# Altium PCB STM Custom Shield for UAV.PcbDoc
Units mil, origin at the board's own origin, x right, y up, seen from the top; angles counter-clockwise.
Board outline 2778.46 x 2376.3 mil, 2 copper layers (Top Layer, Bottom Layer); 15 components, 11 nets, 113 pads, 37 vias.
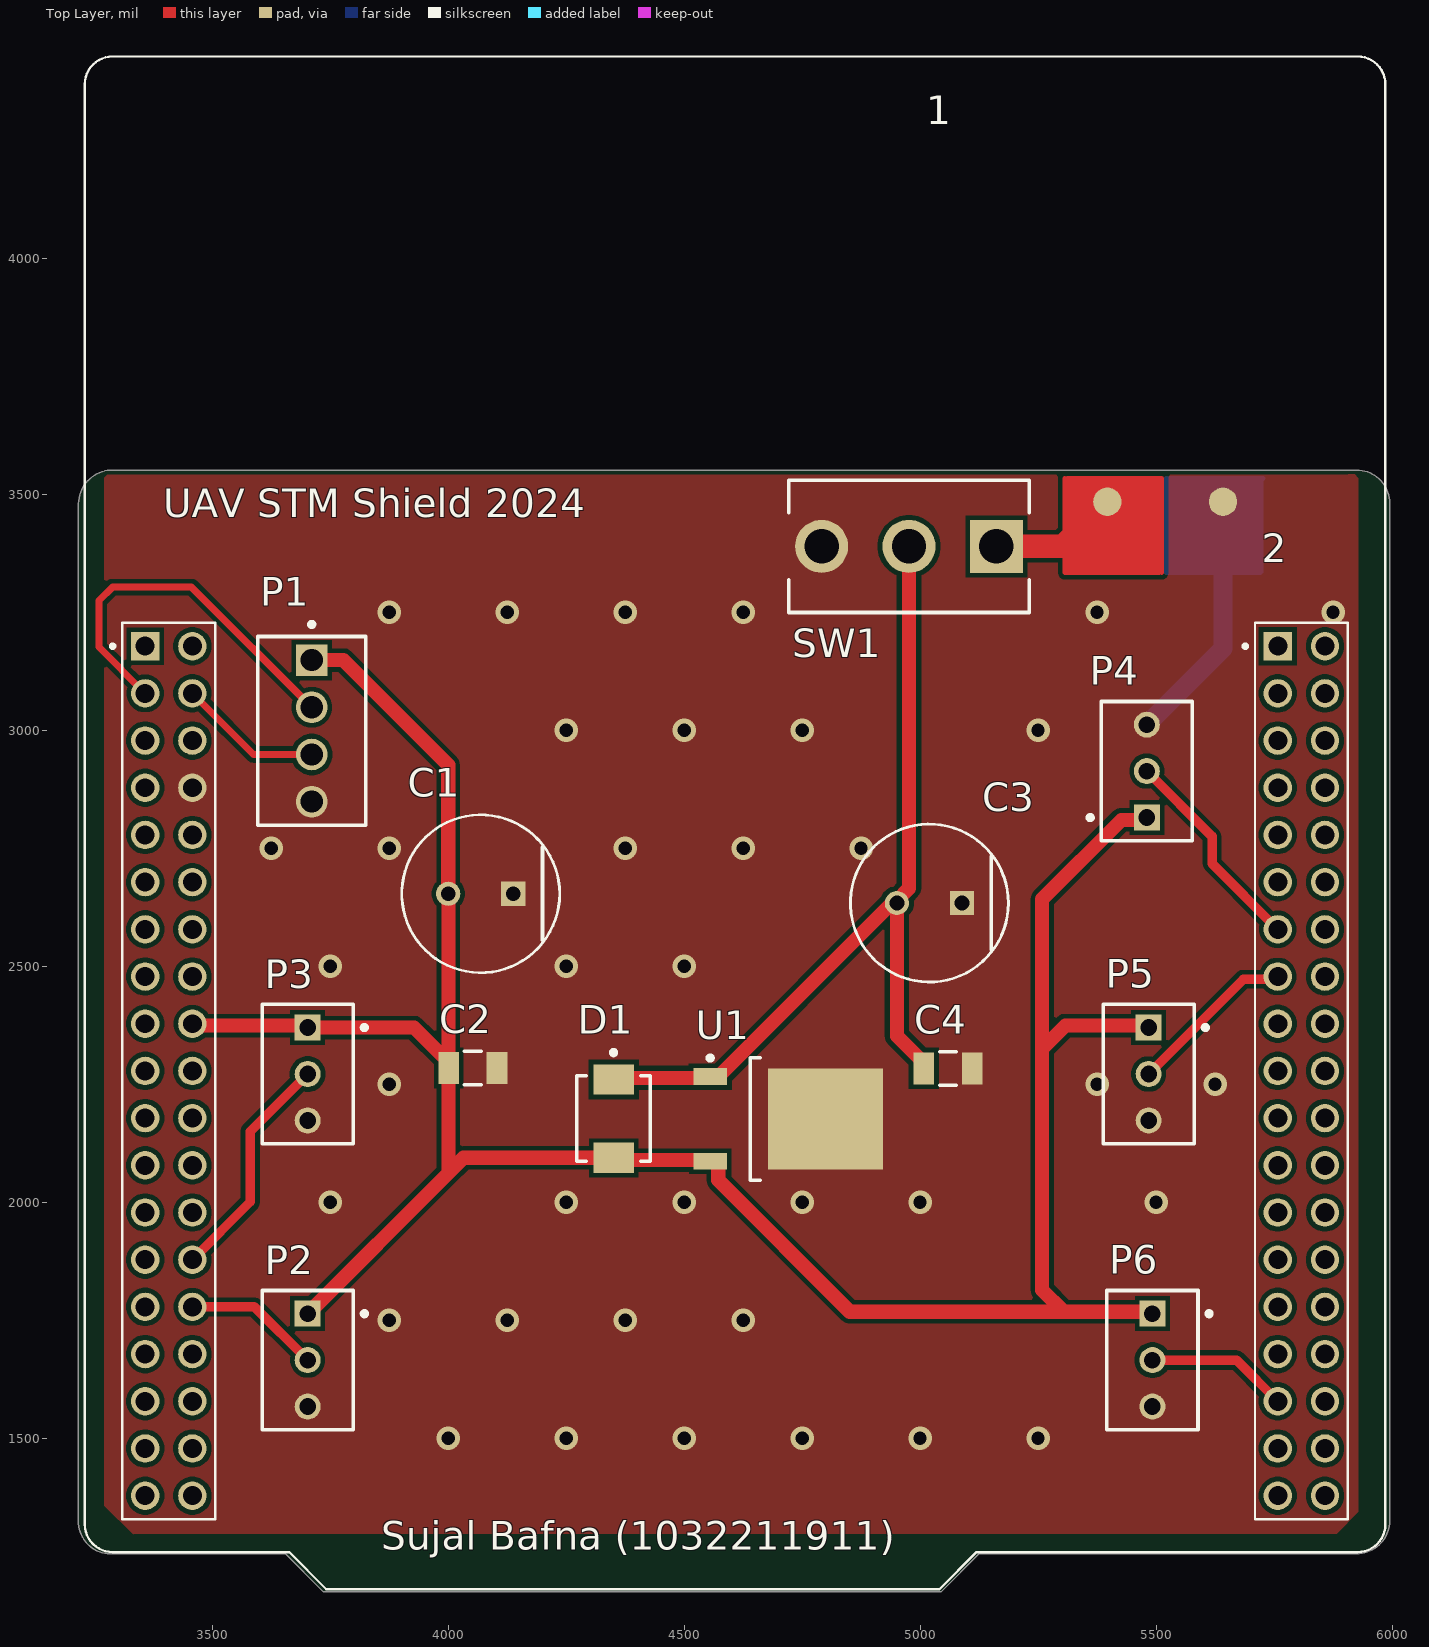
[diagram p0: Top Layer view]
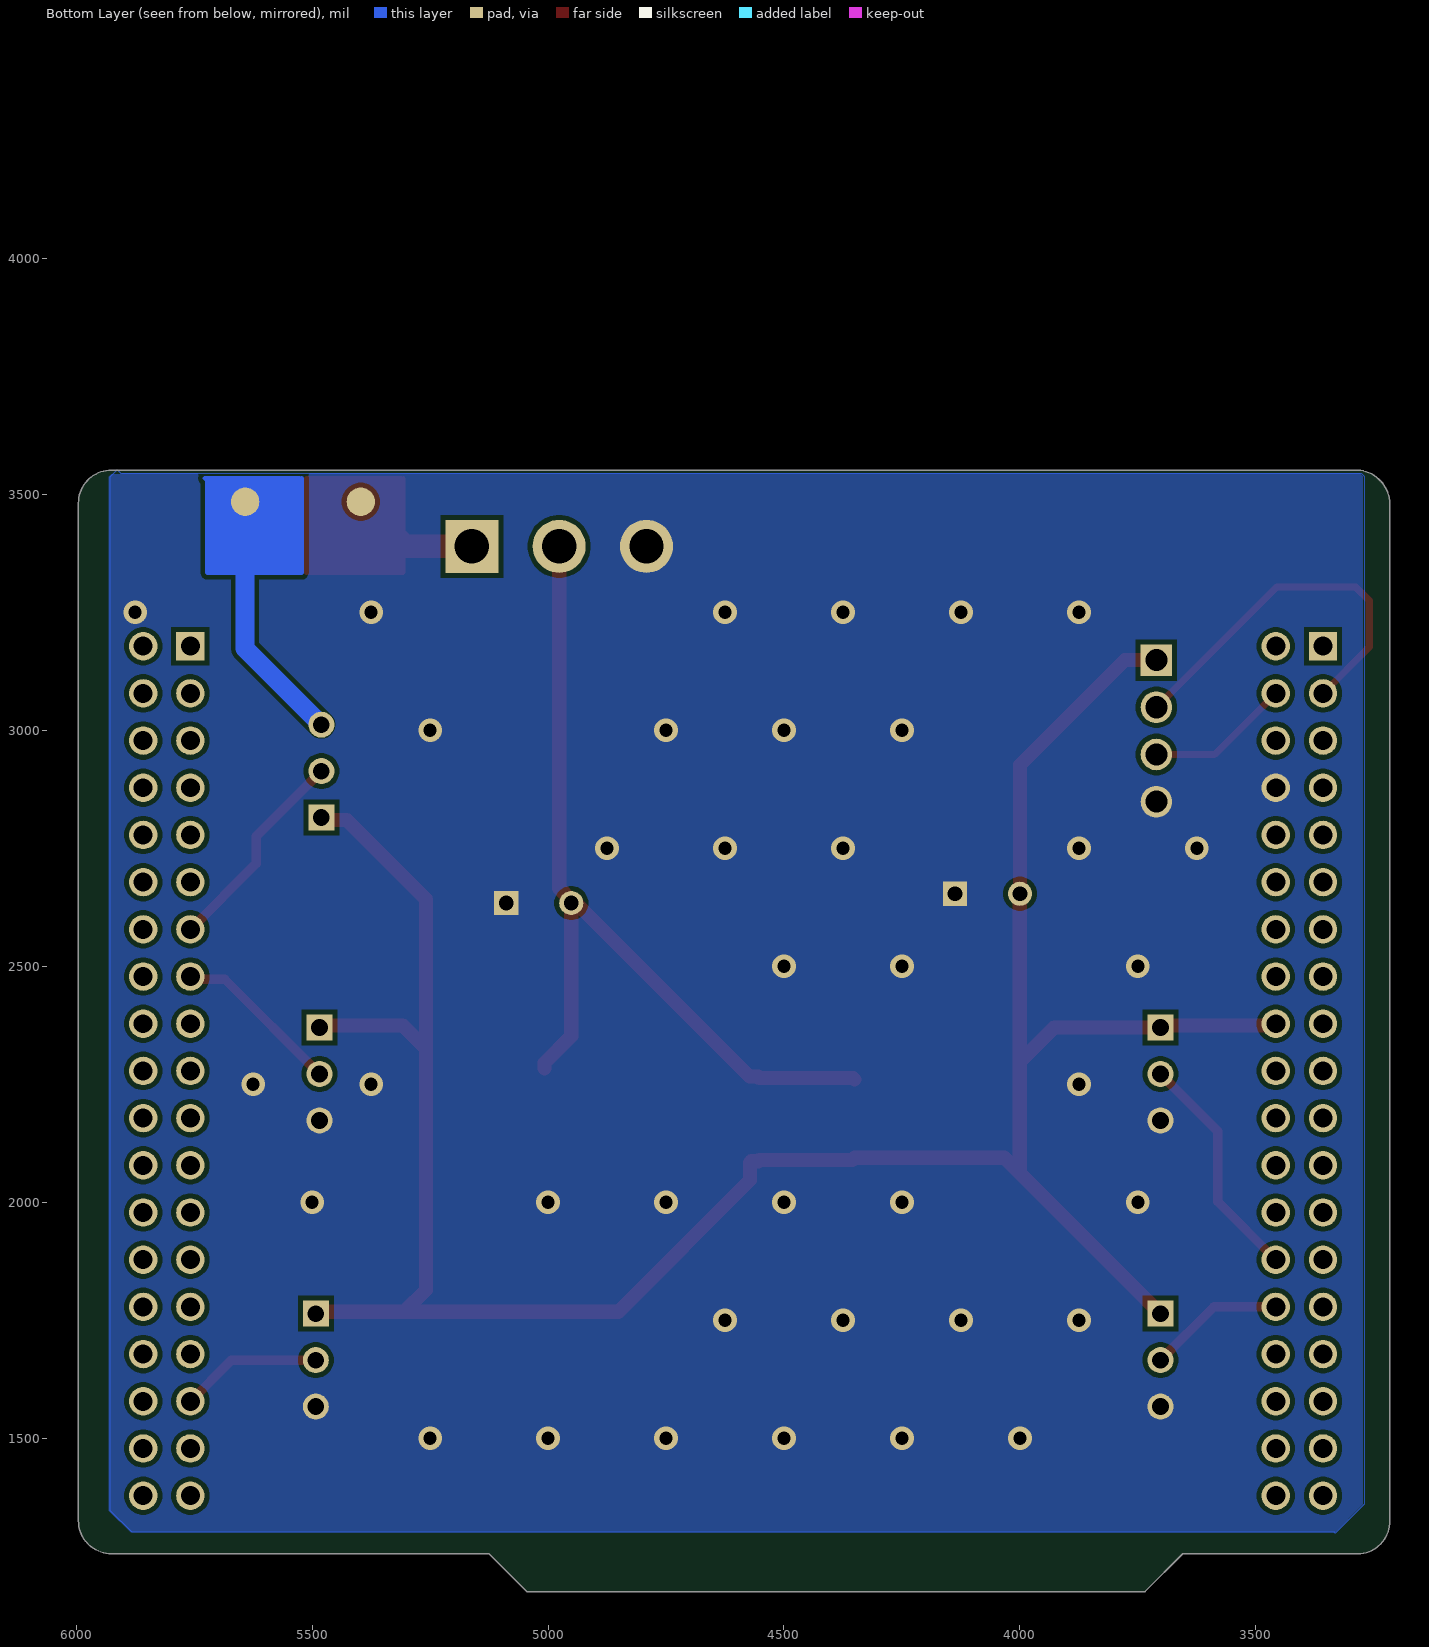
[diagram p1: Bottom Layer view, seen from below]
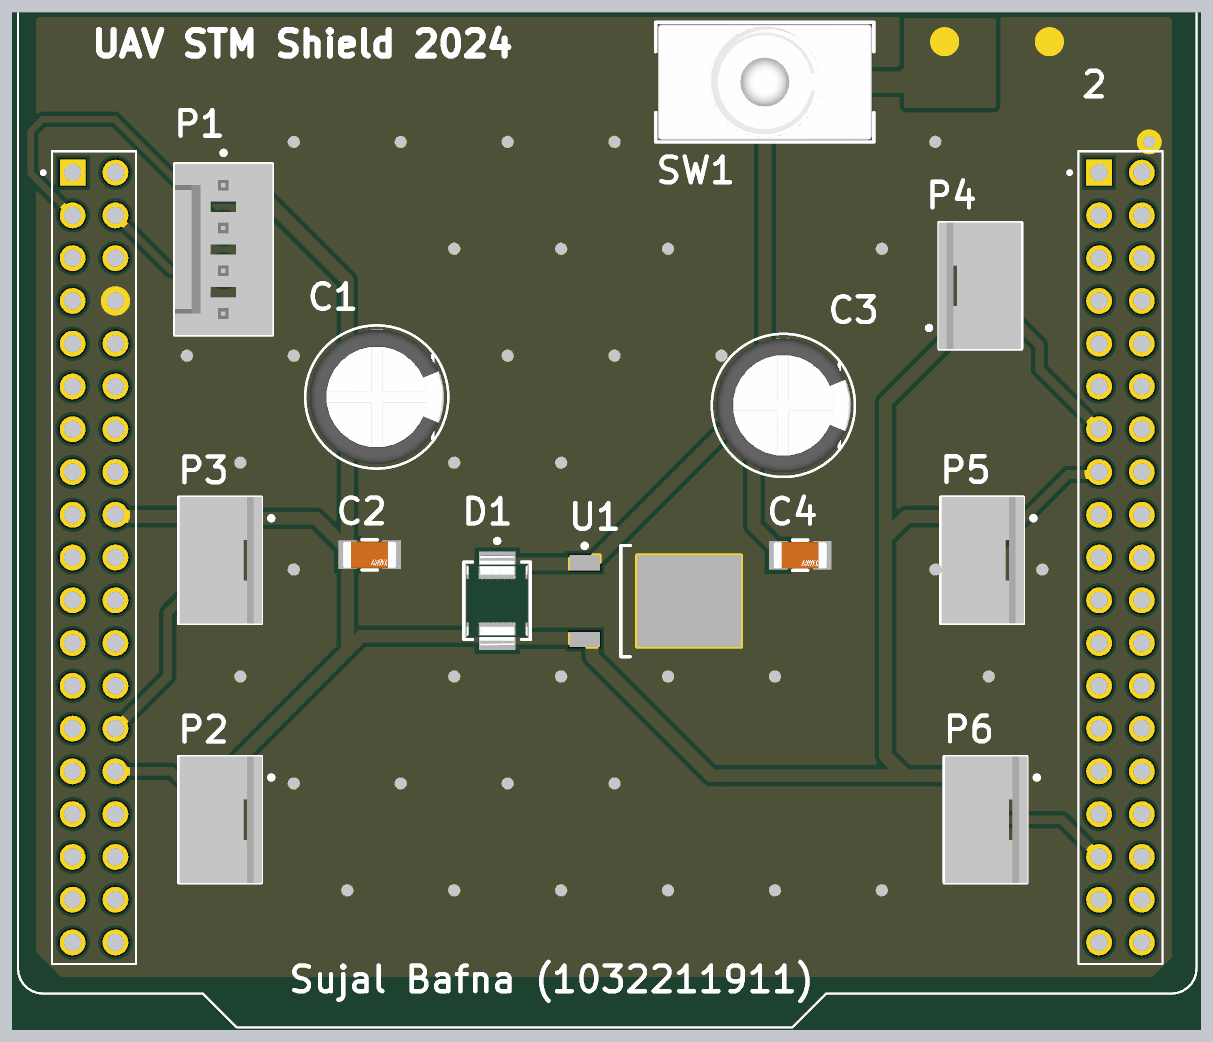
[diagram p2: 3D render of the assembled board from above, using the file's embedded part models]

## Layer stack, top to bottom
Top Solder: solder mask 0.4, Solder Resist, Dk 3.5
Top Layer: signal copper 1.4
Dielectric 1: dielectric 12.6, FR-4, Dk 4.8
Bottom Layer: signal copper 1.4
Bottom Solder: solder mask 0.4, Solder Resist, Dk 3.5

## Board outline
3216.54,1318.9 ccw(c3285.22,1323.68) 3290,1255 3655,1255 3735,1175 5045,1175 5125,1255 5925,1255 ccw(c5925,1325) 5995,1325 5995,3481.3 ccw(c5925,3481.3) 5925,3551.3 3290,3551.3 ccw(c3288.76,3479.07) 3216.54,3480.31

## Design rules (kind name [scope] priority, off if disabled: settings)
Clearance Clearance_1 [All] p1: gap=10 ignorepadtopadclearanceinfootprint=FALSE except(0: Arc-Hole Track-Hole SMDPad-Hole THPad-Hole Via-Hole Fill-Hole Poly-Hole Region-Hole Text-Hole)
Clearance [All] p2: gap=10 ignorepadtopadclearanceinfootprint=FALSE except(0: Arc-Hole Track-Hole SMDPad-Hole THPad-Hole Via-Hole Fill-Hole Poly-Hole Region-Hole Text-Hole; 30: Arc-Fill Arc-Poly Arc-Region Track-Fill Track-Poly Track-Region SMDPad-Fill SMDPad-Poly SMDPad-Region THPad-Fill THPad-Poly THPad-Region Fill-Fill Fill-Poly Fill-Region Poly-Poly Poly-Region Region-Region)
PlaneClearance [All] p1: clearance=80
PlaneConnect [All] p1: planeconnectstyle=Direct reliefexpansion=20 reliefentries=4 reliefconductorwidth=10 reliefairgap=10
PolygonConnect [InNet('GND_D') vs InNet('GND_D')] p1: connectstyle=Direct reliefconductorwidth=10 reliefentries=4 polygonreliefangle="90 Angle" airgapwidth=10
RoutingVias [All] p1: holewidth=28 width=50 viastyle="Through Hole" minholewidth=28 minwidth=50 maxholewidth=28 maxwidth=50
ShortCircuit ShortCircuit_1 [All] p1: allowed=FALSE
ShortCircuit [All] p2: allowed=FALSE
SolderMaskExpansion [All] p1: expansion=4 istentingtop=FALSE
Width [All] p1: maxlimit=50 minlimit=10 preferedwidth=10
27 further rules are at their usual default settings.

## Classes and differential pairs
component class "STM Custom Shield for UAV": C1 C3 CON1 CON? D1 IC? P1 P2 P4 P5 P6 PINOUT1 SW1 U1

## Components (designator, comment, footprint, x,y, rotation, side; value= is the part's Value field where it differs from the comment)
1 "NUCLEO-F446RE" *MODULE_NUCLEO-F446RE_NUCLEO-F446RE(PRIMARY) 4607.87,2803.74 r0 top (schematic designator PINOUT1)
2 "T CONN" "Edge Connector" 5346.73,3344.25 r0 top (schematic designator CON1)
C1 "EEUFR1H101" FP-RAD-TH-D_8_0_5-L_11_5-MFG 4068.9,2653.54 r180 top (schematic designator C4)
C2 "12061C104JAT2A" FP-1206-L_3_2_0_2-W_1_6_0-IPC_C 4052.17,2284.45 r0 top (schematic designator C3)
C3 "EEUFR1H101" FP-RAD-TH-D_8_0_5-L_11_5-MFG 5019.69,2633.86 r180 top (schematic designator C1)
C4 "12061C104JAT2A" FP-1206-L_3_2_0_2-W_1_6_0-IPC_C 5059.06,2283.46 r0 top (schematic designator C2)
D1 "STTH1L06U" FP-SMB-MFG 4350.39,2177.17 r270 top
P1 "22-27-2041" MOLX-22-27-2041_V 3710.81,2998.66 r90 top
P2 "171825-3" TECO-171825-3_V 3702.26,1665.35 r270 top (schematic designator P3)
P3 "171825-3" TECO-171825-3_V 3702.26,2271.56 r270 top (schematic designator P2)
P4 "171825-3" TECO-171825-3_V 5480.31,2913.39 r90 top
P5 "171825-3" TECO-171825-3_V 5484.25,2271.65 r270 top
P6 "171825-3" TECO-171825-3_V 5492.13,1665.35 r270 top
SW1 "A101SYCB04" FP-A101SYCB04-MFG 4976.38,3389.76 r270 top
U1 "L78M05CDT-TR" TO-252_L 4720.47,2176.38 r0 top

## Footprints (in the part's own frame and the unit in brackets; to place one, negate y for a bottom-side part, rotate by r counter-clockwise, add the part's x,y. Pads: shape width x height; smd on the part's side, far side on the other; paste and mask are expansions set on the pad)
*MODULE_NUCLEO-F446RE_NUCLEO-F446RE(PRIMARY) [mm]
  rect 1.53x1.53 hole 1.02: CN7_1(-31.75,9.51) CN10_1(29.21,9.51)
  round 1.53 hole 1.02: CN7_2(-29.21,9.51) CN7_3(-31.75,6.97) CN7_4(-29.21,6.97) CN7_5(-31.75,4.43) CN7_6(-29.21,4.43) CN7_7(-31.75,1.89) CN7_8(-29.21,1.89) CN7_9(-31.75,-0.65) CN7_10(-29.21,-0.65) CN7_11(-31.75,-3.19) CN7_12(-29.21,-3.19) CN7_13(-31.75,-5.73) CN7_14(-29.21,-5.73) CN7_15(-31.75,-8.27) CN7_16(-29.21,-8.27) CN7_17(-31.75,-10.81) CN7_18(-29.21,-10.81) CN7_19(-31.75,-13.35) CN7_20(-29.21,-13.35) CN7_21(-31.75,-15.89) CN7_22(-29.21,-15.89) CN7_23(-31.75,-18.43) CN7_24(-29.21,-18.43) CN7_25(-31.75,-20.97) CN7_26(-29.21,-20.97) CN7_27(-31.75,-23.51) CN7_28(-29.21,-23.51) CN7_29(-31.75,-26.05) CN7_30(-29.21,-26.05) CN7_31(-31.75,-28.59) CN7_32(-29.21,-28.59) CN7_33(-31.75,-31.13) CN7_34(-29.21,-31.13) CN7_35(-31.75,-33.67) CN7_36(-29.21,-33.67) CN7_37(-31.75,-36.21) CN7_38(-29.21,-36.21) CN10_2(31.75,9.51) CN10_3(29.21,6.97) CN10_4(31.75,6.97) CN10_5(29.21,4.43) CN10_6(31.75,4.43) CN10_7(29.21,1.89) CN10_8(31.75,1.89) CN10_9(29.21,-0.65) CN10_10(31.75,-0.65) CN10_11(29.21,-3.19) CN10_12(31.75,-3.19) CN10_13(29.21,-5.73) CN10_14(31.75,-5.73) CN10_15(29.21,-8.27) CN10_16(31.75,-8.27) CN10_17(29.21,-10.81) CN10_18(31.75,-10.81) CN10_19(29.21,-13.35) CN10_20(31.75,-13.35) CN10_21(29.21,-15.89) CN10_22(31.75,-15.89) CN10_23(29.21,-18.43) CN10_24(31.75,-18.43) CN10_25(29.21,-20.97) CN10_26(31.75,-20.97) CN10_27(29.21,-23.51) CN10_28(31.75,-23.51) CN10_29(29.21,-26.05) CN10_30(31.75,-26.05) CN10_31(29.21,-28.59) CN10_32(31.75,-28.59) CN10_33(29.21,-31.13) CN10_34(31.75,-31.13) CN10_35(29.21,-33.67) CN10_36(31.75,-33.67) CN10_37(29.21,-36.21) CN10_38(31.75,-36.21)
  silkscreen extent -35,-41.25 35,41.25
"Edge Connector" [mil]
  round 60 all layers, no hole: 0(50,140) 1(295,140)
  Top Layer region: -40,190 -40,-10 160,-10 165,-5 165,190
  Top Layer lines w10: -40,190 -40,50 -40,-10 160,-10 ; -35,190 165,190 165,140 165,60 165,25 165,-10
  Bottom Layer region: 175,190 175,-10 380,-10 380,190
  Bottom Layer lines w10: 175,190 175,-10 295,-10 375,-10 311.08,53.92 311.08,121.08 312.5,122.5 380,190 180,190
  body extent -45,40 382,545, height 300
FP-1206-L_3_2_0_2-W_1_6_0-IPC_C [mil]
  rect 43.49x67.17 smd paste+0 mask+0: 1(-51.21,0) 2(51.21,0)
  silkscreen extent -18,-35 18,35, body extent -77,-39 77,39, height 10
FP-A101SYCB04-MFG [mil]
  rect 112.37x112.37 hole 73 paste-99999 mask+0: 1(0,185)
  round 112.37 hole 73 paste-99999 mask+0: 2(0,0) 3(0,-185)
  silkscreen extent -140,-255 140,255, body extent -144,-259 144,259, height 10
FP-RAD-TH-D_8_0_5-L_11_5-MFG [mm]
  rect 1.3x1.3 hole 0.8 paste-2539.97 mask+0: 1(-1.75,0)
  round 1.3 hole 0.8 paste-2539.97 mask+0: 2(1.75,0)
  silkscreen extent -4.25,-4.25 4.25,4.25, body extent -4.35,-4.35 4.35,4.35, height 0.25
FP-SMB-MFG [mm]
  rect 1.62x2.18 smd paste+0 mask+0: 1(-2.11,0) 2(2.11,0)
  silkscreen extent -3.67,-1.97 2.3,1.97, body extent -3.02,-2.07 3.02,2.07, height 0.25
MOLX-22-27-2041_V [mm] "CONN, 4-Leads, Body 10.16x5.8mm, Pitch 2.54mm"
  rect 1.7x1.7 hole 1.19: 1(3.81,0)
  round 1.7 hole 1.19: 2(1.27,0) 3(-1.27,0) 4(-3.81,0)
  silkscreen extent -5.08,-2.9 5.85,2.9, body extent -5.08,-2.9 5.08,2.9, height 11.7
TECO-171825-3_V [mm] "Connector, 3-Leads, Body 4.9x7.5mm, Pitch 2.5mm"
  rect 1.4x1.4 hole 0.9: 1(-2.5,0)
  round 1.4 hole 0.9: 2(0,0) 3(2.5,0)
  silkscreen extent -3.75,-2.45 3.75,3.17, body extent -3.75,-2.4 3.75,2.5, height 10.4
TO-252_L [mm] "D-PAK, 4-Leads, Body 6.1x6.5mm, Pitch 2.28mm, Lead Span 9.7mm, IPC High Density"
  rect 1.8x0.9 smd: 1(-4.2,2.28) 3(-4.2,-2.28)
  rect 6.2x5.45 smd: 4(2,0)
  silkscreen extent -4.32,-3.3 -1.5,3.4, body extent -2.05,-3.3 4.15,3.3, height 2.4

## Part data
C1 C3: library part CMP-05427-002079-1, "Aluminum Electrolytic Capacitors (Radial Lead Type) 100uF ±20% 50V", Capacitance=100uF, Case/Package=Radial, ESR (Equivalent Series Resistance)=61mR, Max Operating Temperature=105°C, Min Operating Temperature=-40°C, Package Quantity=200, Ripple Current=870mA, Tolerance=20%, Voltage=50V, Construction=RADIAL, Contact Plating=Tin, Diameter=8mm, Height=11.5mm, Height - Seated (Max)=0.512inch, Impedance=61mR, Lead Diameter=0.6mm, Lead Pitch=3.5mm, Lead/Base Style=Straight, Length=11.5mm, Life (Hours)=6000Hour, Mount="Through Hole", Number of Pins=2, Packaging=Bulk, Radiation Hardening=No, REACH SVHC="No SVHC", Ripple Current (AC)=870mA, RoHS Compliant=Yes, Series=FR, Termination=Radial, Voltage Rating=50V, Voltage Rating (DC)=50V
C2 C4: library part CMP-04427-013576-1, "General Purpose Ceramic Capacitor, 1206, 100nF, 5%, X7R, 15%, 100V", Capacitance=100nF, Case Code (Imperial)=1206, Case Code (Metric)=3216, Dielectric=X7R, Dielectric Material=Ceramic, Max Operating Temperature=125°C, Min Operating Temperature=-55°C, Package Quantity=1, Tolerance=5%, Voltage=100V, Case/Package=1206, Construction=Flat, Contact Plating=Tin, Depth=1.6mm, Height=1.27mm, Lead Free="Lead Free", Length=3.2mm, Mount="Surface Mount", Number of Pins=2, Packaging="Tape and Reel", Radiation Hardening=No, REACH SVHC="No SVHC", RoHS Compliant=Yes, Series=-, Termination=SMD/SMT, Thickness=0.05inch, Voltage Rating=100V, Voltage Rating (DC)=100V, Width=0.063inch
D1: library part CMP-12188-000011-1, "DIODE GEN PURP 600V 1A SMB", Forward Current=1A, Manufacturer=STMicroelectronics, Max Junction Temp=+175°C, Max Repetitive Reverse Voltage=600V, Max Surge Forward Current=20A, Package=SMB, Peak Reverse Current=1uA, Temperature="to +175°C", Automotive=No, Category=Diode, ComponentLink2Description=Datasheet, ComponentLink2URL=https://www.st.com/resource/en/datasheet/stth1l06.pdf, Device Class L1="Discrete Semiconductors", Device Class L2=Diodes, Device Class L3="Rectifier Diodes", Digikey Description="DIODE GEN PURP 600V 1A SMB", Height=2.65mm, Lead Free=Yes, Manufacturer Part Number=STTH1L06U, Mouser Description="STTH1L06 Series 1 A 1.05 V 80 ns Turbo 2 Ultrafast Rectifier SMT - DO-214AA", Octopart=https://octopart.com/stth1l06u-stmicroelectronics-324444, Reverse Voltage=600V, RoHS=TRUE, Standoff Height=0.05mm, Temperature Range High=+175°C
P1: library part CMP-2000-05243-1, "Male Header, Pitch 2.54 mm, 1 x 4 Position, Height 11.7 mm, Tail Length 3.56 mm, RoHS, Bulk", Current Rating=4A, Manufacturer=Molex, Operating Temperature=0degCto+75degC, Voltage Rating=250V, Contact Material=Tinplatedbrass, Datasheet URL=http://www.molex.com/pdm_docs/sd/022272041_sd.pdf, Datasheet Version="Rev. F, 06/2009", Housing Material=Nylon(UL94V-0), Manufacturer URL=http://www.molex.com/
P2 P3 P4 P5 P6: library part CMP-2000-07494-1, "Male Header, Pitch 2.5 mm, 1 x 3 Position, Height 10.4 mm, Tail Length 3.6 mm,  / -20 to 95 degC / , RoHS, Bulk", Colour=Natural, Contact Resistance=20mOhm, Flammability Rating=UL94V-0, Manufacturer="TE Connectivity", Max Current Rating=3.5A, Max Operating Temperature=95degC, Max Voltage Rating (AC)=250V, Max Voltage Rating (DC)=350.25kV, Min Operating Temperature=-20degC, Package Description="Male Header, Pitch 2.5 mm, 1 x 3 Position, Height 10.4 mm, Tail Length 3.6 mm", Package Quantity=1000, Voltage Rating=350V, Approvals=UL, Backwall/Post Interruptions=No(Without), Connector Type=Header, Contact Gender=Male, Contact Material=Brass, Contact Mating Length=0.295inch, Contact Plating=Tin, Contact Retention=No(Without), Contact Shape=Square, Datasheet URL=http://www.te.com/commerce/DocumentDelivery/DDEController?Action=showdoc&DocId=Customer+Drawing%7F171825%7FY3%7Fpdf%7FEnglish%7FENG_CD_171825_Y3.pdf%7F171825-3, Datasheet Version="Rev. Y3, 12/2016", Depth=4.9mm, Height=0.409inch, Housing Colour=Natural, Housing Material=Nylon, Length=7.5mm, Manufacturer URL=http://www.te.com/, Mating Alignment=Yes(With), Mating Post Length=7.5mm, Mating Retention=Yes(With), Mount=ThroughHole, Mounting Technology=ThroughHole, Number of Contacts=3, Number of Positions=3, Number of Rows=1, Orientation=Straight, Package Reference=171825-3, Packaging=Bag, Panel Mount Retention=No(Without), PCB Mount Alignment=No(Without), PCB Mount Retention=Without, PCB Mounting Orientation=Vertical, PCB Thickness=0.063inch, Pitch=2.5mm, Plating Thickness=0.8um, REACH SVHC=NoSVHC, RoHSCompliant=True, Strain Relief=No(Without), Tail Length=0.142inch, Termination=Solder
SW1: library part CMP-03408-000017-1, "SWITCH TOGGLE SPDT 0.4VA 20V", Actuator Color=Chrome, Contact Current Rating=400mA, Contact Resistance=10mR, Flammability Rating="UL94 V-1", Insulation Resistance=30MR, Max Operating Temperature=85°C, Max Voltage Rating (AC)=20V, Min Operating Temperature=-30°C, Package Quantity=100, Power Rating=400mW, Actuator Length=10.41mm, Actuator Material=Phenolic, Actuator Type="Standard Round", Contact Material=Copper, Contact Plating=Gold, Depth=6.86mm, Electrical Life=6000Cycles, ELV=Compliant, Illumination Type=Non-Illuminated, Lead Free="Lead Free", Max Voltage Rating (DC)=20V, Mount=Panel, Number of Poles=1, Number of Positions=2, Orientation=Straight, Packaging=Bulk, Radiation Hardening=No, REACH SVHC="No SVHC", RoHS Compliant=Yes, Series="Gemini A", Switch Function=On-On, Termination="PC Pins", Throw Configuration=SPDT, Voltage Rating (AC)=20V, Voltage Rating (DC)=20V
U1: library part CMP-0244-00178-1, "Positive Voltage Regulator, 5V, 3-Pin DPAK, Tape and Reel", ComponentLink1Description="Manufacturer URL", ComponentLink1URL=http://www.st.com, ComponentLink2Description=Datasheet, ComponentLink2URL=http://www.st.com/internet/com/TECHNICAL_RESOURCES/TECHNICAL_LITERATURE/DATASHEET/CD00000447.pdf, DatasheetVersion=1/11/2010, PackageDescription="3-Pin Transistor Outline Package 2.28 mm Pitch, 9.7 mm Lead Span (DPAK)", PackageReference=TO-252, PackageVersion=2011
1: Check_prices=https://www.snapeda.com/parts/NUCLEO-F446RE/STMicroelectronics/view-part/?ref=eda, SnapEDA_Link=https://www.snapeda.com/parts/NUCLEO-F446RE/STMicroelectronics/view-part/?ref=snap

## Via types
v1: diameter 50, hole 28, Top Layer to Bottom Layer, tented both sides, 36 vias
v2: diameter 50, hole 28, Top Layer to Bottom Layer, 1 vias

## Nets (pads, with @x,y where several pads share a name; then routed paths per layer and width w, separated by ;. In a path a pad name is that pad's centre, name@x,y a point inside that pad or via, vN(x,y) a via of type N, cw(c..) or ccw(c..) an arc to the next point about the centre after c; other vN are vias at no path point)
GND_D: 1.CN7_8 2.1 C1.1 C2.2 C3.1 C4.2 P1.4 P2.3 P3.3 P4.3 P5.3 P6.3 SW1.3 U1.4 | length 539.3
  Bottom Layer w40: P4.3 5641.73,3173.23 5641.73,3334.25 2.1
  other v1: 4000,1500 4250,1500 4500,1500 4750,1500 5000,1500 5250,1500 3875,1750 4125,1750 4375,1750 4625,1750 3750,2000 4250,2000 4500,2000 4750,2000 5000,2000 5500,2000 3875,2250 5375,2250 5625,2250 3750,2500 4250,2500 4500,2500 3625,2750 3875,2750 4375,2750 4625,2750 4875,2750 4250,3000 4500,3000 4750,3000 5250,3000 3875,3250 4125,3250 4375,3250 4625,3250 5375,3250
  other v2: 5875,3250
NetC1_2: C3.2 C4.1 D1.1 SW1.2 U1.1 | length 1895.7
  Top Layer w30: D1.1 4353.58,2263.43 4552.4,2263.43 U1.1 4572.83,2266.14 4936.5,2629.81 4946.73,2629.81 C3.2 ; SW1.2 4976.38,2665.18 4950.79,2639.59 C3.2 ; C4.1 5007.84,2295.31 4950.79,2352.36 C3.2
PWM1: 1.CN7_28 P3.2 | length 494.6
  Top Layer w20: 1.CN7_28 3580.56,2000.83 3580.56,2149.85 P3.2
PWM2: 1.CN7_30 P2.2 | length 291.1
  Top Layer w20: 1.CN7_30 3589.47,1778.15 P2.2
PWM3: 1.CN10_13 P4.2 | length 450.2
  Top Layer w20: P4.2 5618.61,2775.1 5618.61,2717.42 1.CN10_13
PWM4: 1.CN10_15 P5.2 | length 359.2
  Top Layer w20: P5.2 5684.96,2472.36 5752.09,2472.36 1.CN10_15
PWM5: 1.CN10_33 P6.2 | length 301.9
  Top Layer w20: P6.2 5670.67,1665.35 1.CN10_33
UART5_RX: 1.CN7_4 P1.3 | length 306.6
  Top Layer w15: 1.CN7_4 3587.36,2948.66 P1.3
UART5_TX: 1.CN7_3 P1.2 | length 805.3
  Top Layer w15: 1.CN7_3 3259.84,3176.18 3259.84,3274.61 3288.39,3303.15 3456.33,3303.15 P1.2
VP_5V_D: 1.CN7_18 C1.2 C2.1 D1.2 P1.1 P2.1 P3.1 P4.1 P5.1 P6.1 U1.3 | length 5341.7
  Top Layer w30: 1.CN7_18 3461.96,2374.06 3698.18,2374.06 P3.1 3927.26,2369.98 C2.1@4000.48,2296.77 ; P2.1 4000.48,2061.99 ; P1.1 3777.52,3148.66 4000,2926.18 C1.2 4000.48,2653.07 C2.1@4000.48,2296.77 ; P4.1 5475.33,2809.97 5426.54,2809.97 5258.5,2641.93 5258.5,2325 ; P5.1 5480.11,2374.22 5307.72,2374.22 5258.5,2325 ; P6.1 5487.99,1767.92 5304.62,1767.92 ; 4000.48,2061.99 C2.1@4000.48,2296.77 ; 4000.48,2061.99 4032.58,2094.09 D1.2 4355.16,2089.33 4552.4,2089.33 U1.3 4569.4,2086.61 4572.12,2083.9 4572.12,2046.82 4851.02,1767.92 5304.62,1767.92 ; 5258.5,2325 5258.5,1814.03 5304.62,1767.92
VP_8V: 2.0 SW1.1 | length 274.5
  Top Layer w50: SW1.1 5302.24,3389.76 5306.73,3394.25 2.0
pads on no net: 1.CN7_1 1.CN7_2 1.CN7_5 1.CN7_6 1.CN7_7 1.CN7_9 1.CN7_10 1.CN7_11 1.CN7_12 1.CN7_13 1.CN7_14 1.CN7_15 1.CN7_16 1.CN7_17 1.CN7_19 1.CN7_20 1.CN7_21 1.CN7_22 1.CN7_23 1.CN7_24 1.CN7_25 1.CN7_26 1.CN7_27 1.CN7_29 1.CN7_31 1.CN7_32 1.CN7_33 1.CN7_34 1.CN7_35 1.CN7_36 1.CN7_37 1.CN7_38 1.CN10_1 1.CN10_2 1.CN10_3 1.CN10_4 1.CN10_5 1.CN10_6 1.CN10_7 1.CN10_8 1.CN10_9 1.CN10_10 1.CN10_11 1.CN10_12 1.CN10_14 1.CN10_16 1.CN10_17 1.CN10_18 1.CN10_19 1.CN10_20 1.CN10_21 1.CN10_22 1.CN10_23 1.CN10_24 1.CN10_25 1.CN10_26 1.CN10_27 1.CN10_28 1.CN10_29 1.CN10_30 1.CN10_31 1.CN10_32 1.CN10_34 1.CN10_35 1.CN10_36 1.CN10_37 1.CN10_38

## Polygon pours and split planes (outlines as drawn)
GND_D on Top Layer "GND_D_L01_P000" (solid, remove dead copper, pour order 0): 3271.65,1356.89 3332.5,1296.05 3333.83,1297.38 5882.35,1297.38 5928.65,1343.67 5928.65,3534.44 5914.03,3549.06 5906.63,3541.66 3277.88,3541.66 3271.65,3535.43
GND_D on Bottom Layer "GND_D_L02_P004" (solid, remove dead copper, pour order 4): 3273.62,1359.84 3334.47,1299 3335.8,1300.33 5884.32,1300.33 5930.61,1346.62 5930.61,3537.39 5916,3552.01 5908.6,3544.61 3279.85,3544.61 3273.62,3538.39
no net on Bottom Layer "NONET_L02_P003" (solid, remove dead copper, pour order 3): 3270.67,1359.84 3331.52,1299 3332.85,1300.33 5881.37,1300.33 5927.66,1346.62 5927.66,3537.39 5913.04,3552.01 5905.65,3544.61 3276.9,3544.61 3270.67,3538.39

## Other copper
Multi-Layer:
  pour cut-out: 5906.5,3542.32 5926.18,3542.32 5926.18,3543.31 5917.32,3552.17 5915.35,3550.2 5909.45,3550.2 5909.45,3545.28

## Silkscreen, mask and mechanical layers (free items; w line width, h text height)
Top Overlay:
  text "UAV STM Shield 2024" at 3395.89,3451.01 h60
  text "Sujal Bafna (1032211911)" at 3858.27,1263.78 h60
Mechanical 1:
  the board outline again, w10